# Altium PCB SRM_DOUBLE_V2_SIGNAL.PcbDoc (part 2 of 2)
Units mil, origin at the board's own origin, x right, y up, seen from the top; angles counter-clockwise.
Board outline 9351.05 x 5413.48 mil, 2 copper layers (Top Layer, Bottom Layer); 135 components, 145 nets, 510 pads, 115 vias.
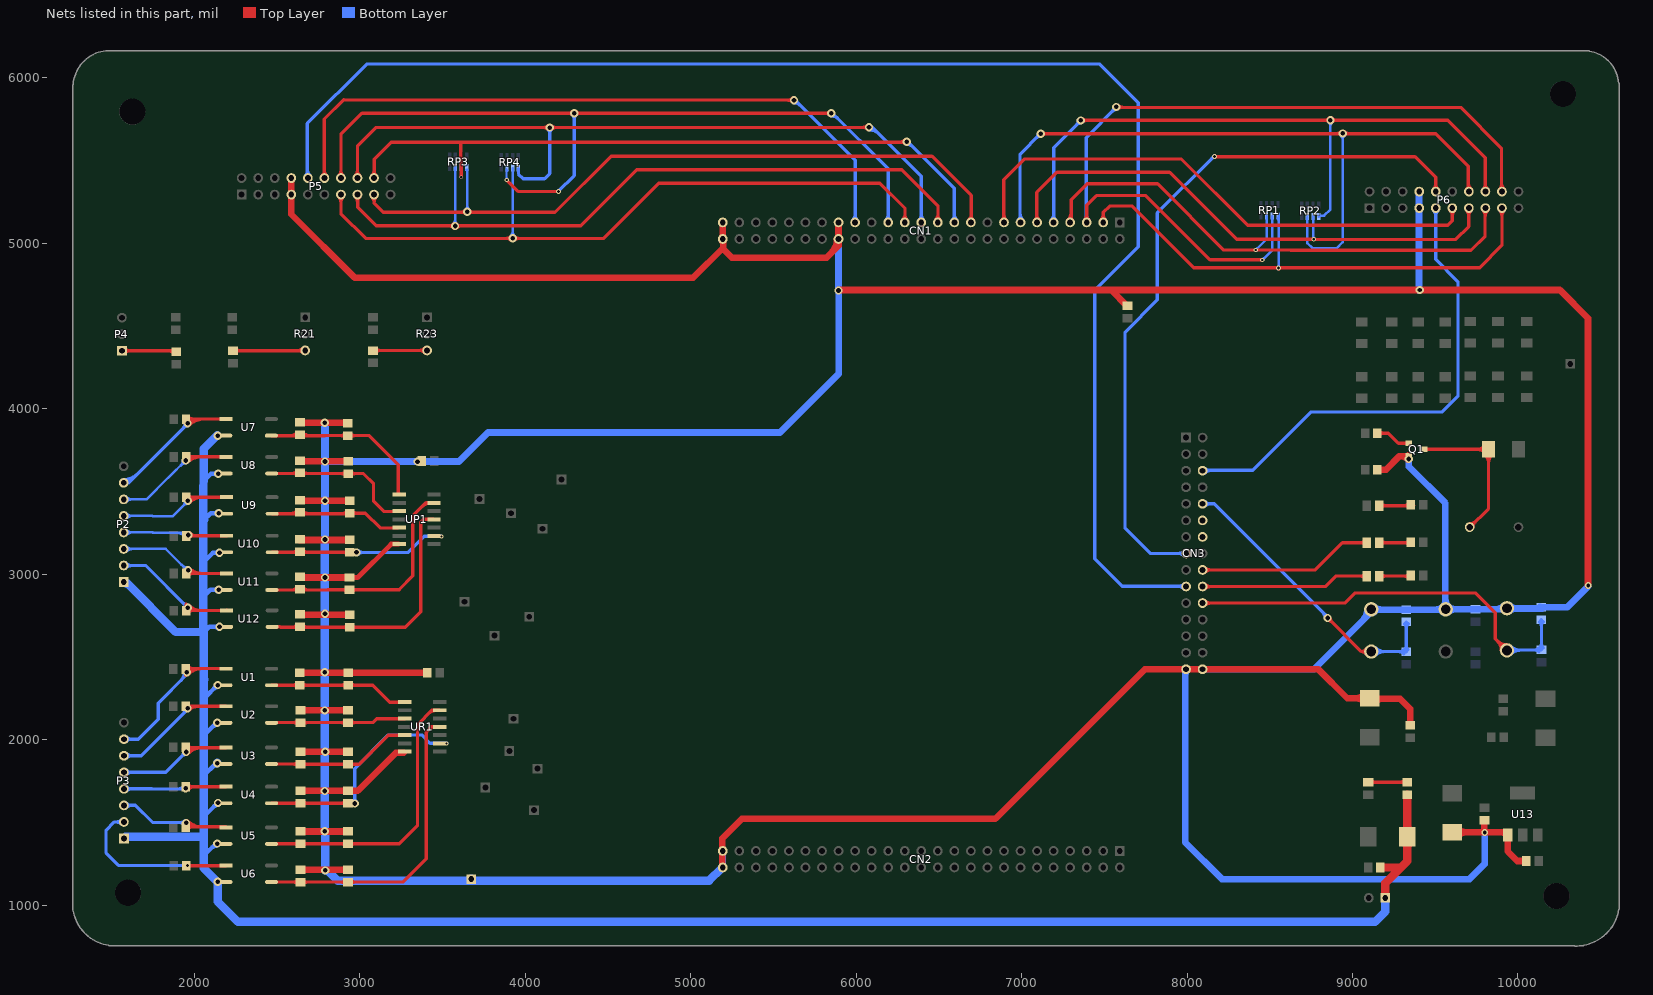
[diagram p2: the nets of this part, all layers, seen from the top]

## Via types
v1: diameter 50, hole 28, Top Layer to Bottom Layer, 67 vias
v2: diameter 30, hole 18, Top Layer to Bottom Layer, 19 vias
v3: diameter 40, hole 22, Top Layer to Bottom Layer, 12 vias
v4: diameter 24, hole 12, Top Layer to Bottom Layer, 9 vias
v5: diameter 26, hole 14, Top Layer to Bottom Layer, 5 vias
v6: diameter 50, hole 26, Top Layer to Bottom Layer, 1 vias
v7: diameter 35, hole 18, Top Layer to Bottom Layer, 1 vias
v8: diameter 22, hole 14, Top Layer to Bottom Layer, 1 vias

## Nets (pads, with @x,y where several pads share a name; then routed paths per layer and width w, separated by ;. In a path a pad name is that pad's centre, name@x,y a point inside that pad or via, vN(x,y) a via of type N, cw(c..) or ccw(c..) an arc to the next point about the centre after c; other vN are vias at no path point) (continued)
FWD: C3.2 CN3.10 key1.3 R11.1 | length 2344.3
  Top Layer w20: v1@8847,2740 9054,2533 ; v1@8849,2721 cw(c8849,2679.96) 8878.02,2708.98 ; v1@8864,2736 ccw(c8895.38,2736) 8873.19,2713.81 ; key1.3@9084.48,2515.79 ccw(c9054,2497.4) 9054,2533 ; key1.3@9084.48,2550.21 cw(c9054,2568.6) 9054,2533 ; key1.3@9113,2533 9054,2533
  Bottom Layer w20: CN3.10@8094,3426 8164,3426 v1@8847.5,2742.5 ; CN3.10@8107.81,3412.19 cw(c8141.14,3378.86) 8141.14,3426 cw(c8141.14,3473.14) CN3.10@8107.81,3439.81 ; 8819.86,2770.14 cw(c8785.72,2736) v1@8834,2736 ; 8831.93,2758.07 ccw(c8849,2775.14) v1@8849,2751 ; key1.3@9113,2533 9322.4,2533 9322.7,2532.7 R11.1@9324,2531.4 C3.2@9324,2711 ; key1.3@9136.55,2509.45 cw(c9193.41,2452.59) 9193.41,2533 cw(c9193.41,2613.41) key1.3@9136.55,2556.55 ; 9278.57,2533 cw(c9278.57,2489.9) R11.1@9309.04,2520.38 ; 9286.28,2533 ccw(c9286.28,2565.18) R11.1@9309.04,2542.43 ; R11.1@9312.98,2542.43 ccw(c9286.36,2569.04) 9324,2569.04 ccw(c9361.64,2569.04) R11.1@9335.02,2542.43 ; C3.2@9313.98,2700.57 cw(c9289.78,2676.37) 9324,2676.37 ; 9324,2671.55 cw(c9365.05,2671.55) C3.2@9336.02,2700.57
  other v1: 8849,2736
GND: C3.1 C4.1 C5.1 C6.1 C7.1 C8.1 C9.1 C10.1 C11.1 C12.1 C16.1 C17.1 C18.1 C19.1 C20.1 C21.1 C22.1 C23.2 C24.1 C25.1 C26.1 C27.2 CN1.35 CN1.36 CN1.49 CN1.50 CN2.49 CN2.50 CN3.29 CN3.30 key1.1 key2.1 key3.1 L4.2 P5.7 P5.8 P6.7 P6.8 Q1.2 R14.2 R15.2 R16.2 R17.2 R18.2 R19.2 R31.2 R32.2 R33.2 R34.2 R35.2 R36.2 R37.2 T8.1 U13.1 UP1.7 UR1.7 | length 39889.6
  Top Layer w30: 2898,2980.4 2986.57,2980.4 3188.17,3182 UP1.7@3233,3182
  Top Layer w40: P5.8@2585,5401 2585,5176 2968,4793 5015,4793 5196,4974 ; R36.2@2637,2754.4 C22.1@2938,2754.4 ; R35.2@2637,2980.4 C21.1@2936,2980.4 2898,2980.4 ; R34.2@2637,3207.4 C20.1@2939,3207.4 ; R33.2@2637,3444.4 C19.1@2938,3444.4 ; R32.2@2637,3683.4 C18.1@2929,3683.4 ; R31.2@2637.97,3916.32 v1(2787.27,3915.13) 2922.34,3914.05 2922.92,3915.41 C17.1@2924,3915.4 ; R16.2@2641.6,1927.4 C8.1@2928.53,1927.4 ; R17.2@2655,1691.4 2987.4,1691.4 3216,1920 UR1.7@3264,1920 ; 2761,2754.4 ccw(c2761,2789) v1@2785.46,2764.54 ; v1@2792.54,2764.54 ccw(c2817,2789) 2817,2754.4 ; C8.1@2927.95,1927.04 2928.22,1926.52 C8.1@2929,1925 ; C11.1@2928,1214.4 R19.2@2640,1214.4 ; C10.1@2928,1445.4 R18.2@2640,1445.4 ; C7.1@2928,2178.4 R15.2@2640,2178.4 ; C12.1@3407.6,2405 3407,2404.4 R14.2@2636,2404.4 ; CN1.50@5186.26,5020.26 cw(c5162.76,4996.76) 5196,4996.76 ; CN2.50@5191,1228 5191,1404 5309,1522 6841,1522 7745,2426 CN3.30@8098,2426 ; CN1.49@5192,5130 5193,5130 CN1.50@5193,5027 ; CN1.50@5196,5026 5196,4966 5249,4913 5820,4913 5893,4986 CN1.35@5893,5127 ; 5847.74,4940.74 ccw(c5761.49,5027) CN1.36@5883.47,5027 ; v1@5892,4718 10253,4718 10423,4548 v3@10423,2932 ; 7542,4718 7542,4717 7636.6,4622.4 L4.2@7639,4622.4 ; CN3.30@8090,2427 8792,2427 8968,2251 C27.2@9099,2251 ; C27.2@9072.79,2229.79 ccw(c9021.57,2178.57) 9021.57,2251 ccw(c9021.57,2323.43) C27.2@9072.79,2272.21 ; C27.2@9102,2248 9103.92,2247.95 9107.05,2247.86 9172,2247.91 9287,2248 9349,2186 C26.1@9349,2087.4 ; C27.2@9135.23,2229.8 cw(c9178.91,2186.19) 9178.86,2247.92 ; R37.2@9150.4,3632 9202,3632 9284,3714 9336.16,3714 Q1.2@9336.16,3717.6 ; 9285.89,3714 cw(c9285.89,3643.89) v1@9335.46,3693.46 ; key3.1@9562,2791 key3.1@9564,2793 ; C23.2@9609,1438 9671,1440 ; C23.2@9634.21,1418.79 cw(c9685.43,1367.57) 9685.43,1440 cw(c9685.43,1512.43) C23.2@9634.21,1461.21 ; C23.2@9637.48,1422.67 cw(c9671,1398.94) 9671,1440 ; C23.2@9637.48,1457.33 ccw(c9671,1481.06) 9671,1440 ; v3@9797,1440 C16.1@9797,1513.6 ; 9898.51,1440 cw(c9898.51,1393.39) U13.1@9931.47,1426.35 ; U13.1@9934,1427 U13.1@9938.19,1422.81 ; U13.1@9935.93,1425.07 U13.1@9936.02,1422.96 ; U13.1@9936,1440 9671,1440 ; U13.1@9939,1420 9938.19,1376 9938.19,1324.81 9996,1267 C24.1@10050.6,1267 ; R14.2@2636,2404.4 2674,2404.4 R14.2@2636,2404.4 ; R19.2@2640,1214.4 2678,1214.4 R19.2@2640,1214.4 ; R18.2@2640,1445.4 2678,1445.4 R18.2@2640,1445.4 ; R15.2@2640,2178.4 2678,2178.4 R15.2@2640,2178.4 ; C18.1@2929,3683.4 2891,3683.4 C18.1@2929,3683.4 ; C22.1@2938,2754.4 2900,2754.4 C22.1@2938,2754.4 ; C19.1@2938,3444.4 2900,3444.4 C19.1@2938,3444.4 ; C20.1@2939,3207.4 2901,3207.4 C20.1@2939,3207.4
  Bottom Layer w40: v1@2787,3915.4 v1@2789,3913.4 ; v1@2787.27,3911 v1(2787.27,3915.13) ; v1@2788,1450 v1@2790,1448 ; v1@2788,3209 v1(2789,3210) ; v1(2789,3682) 3599,3682 3774,3857 5539,3857 5895,4213 v1@5895,4713 ; CN2.50@5193,1228 CN2.49@5193,1328 ; v1@5893,4720 CN1.36@5893,5027 ; 7988,2388.51 cw(c8031.49,2388.51) CN3.29@8000.74,2419.26 ; CN3.29@7988,2428 7988,1380 8211,1157 9707,1157 9798,1248 v3@9798,1445 ; CN3.30@8091,2427 8768,2427 9108,2767 key1.1@9121,2767 ; 9061.9,2720.9 ccw(c8994.8,2788) key1.1@9089.69,2788 ; key1.1@9113,2788 9114.5,2789.5 9117.6,2786.4 9561.4,2786.4 key3.1@9563,2788 C5.1@9757.6,2788 ; key1.1@9129.48,2771.52 cw(c9165.41,2735.59) 9165.41,2786.4 ; key1.1@9129.48,2804.48 ccw(c9173.13,2848.13) 9173.13,2786.4 ; 9339,3655 v1@9339,3700 ; 9341,3650 9561,3430 9561,2790 key3.1@9557,2786 ; v6@9402,4713 P6.8@9402,5313 ; 9502.87,2786.4 ccw(c9502.87,2848.13) 9546.52,2804.48 ccw(c9511.56,2839.44) 9561,2839.44 ; 9510.59,2786.4 cw(c9510.59,2735.59) key3.1@9546.52,2771.52 ; 9561,2849.1 ccw(c9624.1,2849.1) 9579.48,2804.48 ccw(c9619.27,2844.27) 9619.27,2788 ccw(c9619.27,2731.73) key3.1@9579.48,2771.52 ; C5.1@9739,2788 9743.01,2787.94 C5.1@9743.53,2787.94 ; C5.1@9743,2787.4 C5.1@9743.6,2788 ; C5.1@9757.01,2787.4 9965.4,2787.4 9967.5,2789.5 key2.1@9969,2788 ; 9858.39,2787.4 ccw(c9858.39,2869.61) key2.1@9916.52,2811.48 ; key2.1@9928.6,2793.4 C4.1@10145,2793.4 ; key2.1@9949.48,2778.52 cw(c9985.41,2742.59) 9985.41,2793.4 ; key2.1@9949.48,2811.48 ccw(c9993.13,2855.13) 9993.13,2793.4 ; 10109.08,2793.4 ccw(c10109.08,2827.38) C4.1@10133.11,2803.36 ; C4.1@10142,2800 10296,2800 10423,2927 v3@10423,2932
  Bottom Layer w50: v1@2788,1209 2804,1209 2865,1148 5111,1148 CN2.50@5188,1225 ; v1@2788,1450 v1@2788,3209 ; v1(2789,3210) v1@2789,3913.4 ; v1(2790,1210) v1@2790,1448 ; 3640.34,1148 ccw(c3640.34,1189.66) T8.1@3669.8,1160.2 ; T8.1@3676.2,1160.2 ccw(c3705.66,1189.66) 3705.66,1148
  other v1: 2788,1447 2788,1690 2790,1927.4 2788,2177 2788,2408 2789,2761 2789,2980.4 2789,3444.4 3348,3681 9339,3697 5893,4715
  other v3: 9800,1439 10424,2932
  other v6: 9406,4718
GND_HALL: C1.1 C2.2 P1.1 P2.1 P3.1 R2.1 U1.3 U2.3 U3.3 U4.3 U5.3 U6.3 U7.3 U8.3 U9.3 U10.3 U11.3 U12.3 | length 14004.3
  Top Layer w50: C1.1@9168.4,1228 9291,1228 ; P1.1@9198,1044 9198,1134 9331,1267 R2.1@9331,1668.6 ; C2.2@9313.32,1385.32 cw(c9270.64,1342.64) 9331,1342.64 cw(c9391.36,1342.64) C2.2@9348.68,1385.32 ; C2.2@9313.32,1440.68 ccw(c9270.64,1483.36) 9331,1483.36 ccw(c9391.36,1483.36) C2.2@9348.68,1440.68
  Bottom Layer w26: 2047,1527 2138,1618 v1(2142,1618) ; 2051.34,2643.66 2089.68,2682 v1(2151,2682) ; 2052,1779 2131,1858 v1@2138,1858 ; 2053.18,2864.22 2094.96,2906 v1(2146,2906) ; 2056,3075 2111,3130 v1(2151,3130) ; 2056,3564 2100,3608 v1(2143,3608) ; 2057,2134 2062,2134 ; 2058,1301 2129,1372 v1(2138,1372) ; 2058,2027 2133,2102 v1(2138,2102) ; 2058,3329 2098,3369 v1(2146,3369) ; 2062,2254 2138,2330 v1(2140,2330) ; 2102.15,1345.15 cw(c2138,1309.3) v1@2138,1360 ; 2103.86,1830.86 cw(c2138,1796.72) v1@2138,1845 ; 2108.98,2077.98 cw(c2138,2048.96) v1@2138,2090 ; 2114.69,1594.69 cw(c2142,1567.37) v1@2142,1606 ; 2116.1,2308.1 cw(c2140,2284.2) v1@2140,2318 ; 2120.93,2312.93 ccw(c2103.86,2330) v1@2128,2330 ; v1@2134.51,3599.51 ccw(c2114.03,3579.03) 2114.03,3608 ccw(c2114.03,3636.97) v1@2134.51,3616.49 ; v1@2137.51,2897.51 ccw(c2117.03,2877.03) 2117.03,2906 ccw(c2117.03,2934.97) v1@2137.51,2914.49 ; v1@2137.51,3360.51 ccw(c2117.03,3340.03) 2117.03,3369 ccw(c2117.03,3397.97) v1@2137.51,3377.49 ; v1@2142.51,2673.51 ccw(c2122.03,2653.03) 2122.03,2682 ccw(c2122.03,2710.97) v1@2142.51,2690.49 ; v1@2142.51,3121.51 ccw(c2122.03,3101.03) 2122.03,3130 ccw(c2122.03,3158.97) v1@2142.51,3138.49
  Bottom Layer w50: P3.1@1571,1401 1583,1413 2055,1413 ; P2.1@1572,2948.47 cw(c1572,2906.16) 1601.92,2936.08 ; P2.1@1572,2953 1575,2950 1588,2950 1886.36,2651.64 2056,2652 ; P3.1@1576.2,1399.8 cw(c1608.07,1367.93) 1608.07,1413 ; 2051.34,2643.66 2055,2643.66 2055,2364 2059,2364 ; 2053,2652 2053.18,2864.22 2053.37,3099.63 2053.57,3329 2053.92,3757.06 ; 2055,1658 2057,1658 ; 2055,2362 2055,1225 v1@2136,1144 ; 2055,3329 2058,3329 ; 2056,3564 2056,3759.14 2059,3762.13 v1@2138,3841 ; v1(2138,1857) v1@2138,1860 ; v1@2140,1139 2140,1022 2263,899 9135,899 9198,962 P1.1@9198,1040
  other v1: 2141,1141 2141,3838
L1: P2.7 R25.2 U7.1 | length 1213
  Top Layer w20: R25.2@1940.32,3930.68 cw(c1960.41,3910.59) R25.2@1960.41,3939 ; R25.2@1954.46,3916.54 cw(c2008.7,3862.3) 2008.7,3939 ; R25.2@1958,3939 U7.1@2193,3939 ; R25.2@1959.43,3929.91 cw(c1981.36,3907.97) 1981.36,3939 ; R25.2@1959.43,3951.96 ccw(c1990.72,3983.25) 1990.72,3939 ; v1@1968.61,3902.39 cw(c2056.98,3814.02) 2056.98,3939
  Bottom Layer w20: P2.7@1572,3552.53 ccw(c1572,3623.81) 1622.41,3573.41 ; P2.7@1572,3553 1602,3553 v1@1956.5,3907.5 ; P2.7@1572,3572.53 ccw(c1572,3692.1) 1656.55,3607.55 ; 1929.56,3880.56 ccw(c1897.13,3913) v1@1943,3913 ; 1939.22,3890.22 cw(c1958,3871.44) v1@1958,3898
  other v1: 1958,3913
L2: P2.4 R28.2 U10.1 | length 948.7
  Top Layer w20: R28.2@1948,3233 U10.1@2194,3233 ; R28.2@1960.43,3220.98 cw(c1989.45,3191.95) 1989.45,3233 ; R28.2@1960.43,3243.02 ccw(c1984.63,3267.22) v1@1984.63,3233 ; R28.2@1973.61,3226.39 cw(c1989.56,3210.44) 1989.56,3233 ; R28.2@1973.61,3247.61 ccw(c2008.87,3282.87) 2008.87,3233
  Bottom Layer w15: P2.4@1575,3253 1749,3253 1747,3252 v1@1961,3251 ; P2.4@1587.58,3237.42 cw(c1625.18,3199.82) 1625.18,3253 cw(c1625.18,3306.18) P2.4@1587.58,3268.58 ; 1887.04,3251.35 cw(c1886.62,3161.33) v1@1950.57,3224.68 ; 1923.25,3251.18 cw(c1923,3197.37) v1@1961.22,3235.24
  other v1: 1963,3237
M1: P2.6 R26.2 U8.1 | length 1070.6
  Top Layer w20: R26.2@1943.46,3691.54 cw(c1988.04,3646.96) 1988.04,3710 ; R26.2@1945.17,3708.52 1945,3710 2190,3710 U8.1@2191,3709 ; v1@1957.61,3677.39 cw(c2036.33,3598.67) 2036.33,3710 ; R26.2@1960.43,3697.98 cw(c1989.45,3668.95) 1989.45,3710 ; R26.2@1960.43,3720.02 ccw(c1984.63,3744.22) 1984.63,3710 ; U8.1@2187,3710 2190.06,3709.94 U8.1@2191.02,3709.92
  Bottom Layer w15: P2.6@1572,3453 1710,3453 1841,3584 1842,3584 v1@1947,3689 ; P2.6@1587.58,3437.42 cw(c1625.18,3399.82) 1625.18,3453 cw(c1625.18,3506.18) P2.6@1587.58,3468.58 ; 1915.42,3657.42 cw(c1947,3625.84) v1@1947,3670.5 ; 1917.83,3659.83 ccw(c1889.67,3688) v1@1929.5,3688
  other v1: 1947,3688
M2: P2.3 R29.2 U11.1 | length 1004.8
  Top Layer w20: R29.2@1948,3005 U11.1@2192,3005 ; R29.2@1957.46,3020.46 ccw(c1994.8,3057.8) 1994.8,3005 ; R29.2@1960.43,2992.98 cw(c1989.45,2963.95) 1989.45,3005 ; R29.2@1960.43,3015.02 ccw(c1984.63,3039.22) 1984.63,3005 ; v1@1971.61,3034.61 ccw(c2043.08,3106.08) 2043.08,3005
  Bottom Layer w15: P2.3@1572,3153 1826,3153 1944,3035 v1@1944,3025 ; P2.3@1587.58,3137.42 cw(c1625.18,3099.82) 1625.18,3153 cw(c1625.18,3206.18) P2.3@1587.58,3168.58 ; 1920.88,3058.12 ccw(c1961,3098.23) v1@1961,3041.5 ; 1935.37,3043.63 cw(c1915.74,3024) v1@1943.5,3024
  other v1: 1961,3024
MCLKRA: CN3.18 D3.2 | length 1194.4
  Top Layer w20: CN3.18@8094,3026 8774,3026 8939,3191 D3.2@9086.86,3191 ; CN3.18@8107.81,3012.19 cw(c8141.14,2978.86) 8141.14,3026 cw(c8141.14,3073.14) CN3.18@8107.81,3039.81 ; D3.2@9075.83,3179.98 ccw(c9049.22,3153.36) 9049.22,3191 ccw(c9049.22,3228.64) D3.2@9075.83,3202.02
MFSRA: C4.2 CN3.22 key2.3 R12.1 | length 2990
  Top Layer w20: CN3.22@8094,2826 8954,2826 9015,2887 9743,2887 9862,2768 9862,2611 key2.3@9931,2542 ; CN3.22@8107.81,2812.19 cw(c8141.14,2778.86) 8141.14,2826 cw(c8141.14,2873.14) CN3.22@8107.81,2839.81 ; key2.3@9899.69,2540 ccw(c9819.28,2540) 9876.14,2596.86 ccw(c9933,2653.72) key2.3@9933,2573.31
  Bottom Layer w20: key2.3@9934,2542 R12.1@10140.4,2542 ; key2.3@9956.55,2516.45 cw(c10018.24,2454.76) 10018.24,2542 ; key2.3@9956.55,2563.55 ccw(c10008.58,2615.58) 10008.58,2542 ; 10097.04,2542 ccw(c10097.04,2584.42) R12.1@10127.04,2554.43 ; 10103.81,2542 cw(c10103.81,2509.15) R12.1@10127.04,2532.38 ; C4.2@10129.98,2713.57 cw(c10100.95,2684.55) 10142,2684.55 ; R12.1@10130.98,2554.43 ccw(c10104.36,2581.04) 10142,2581.04 ccw(c10179.64,2581.04) R12.1@10153.02,2554.43 ; C4.2@10141,2724.6 10142,2723.6 R12.1@10142,2543.4 ; R12.1@10141.4,2544 R12.1@10142,2544.6 ; 10142,2689.37 cw(c10176.22,2689.37) C4.2@10152.02,2713.57
MFSZA: CN3.20 D4.2 | length 1152.1
  Top Layer w20: CN3.20@8094,2926 8836,2926 8899,2989 D4.2@9086.86,2989 ; CN3.20@8107.81,2912.19 cw(c8141.14,2878.86) 8141.14,2926 cw(c8141.14,2973.14) CN3.20@8107.81,2939.81 ; D4.2@9075.83,2977.98 ccw(c9049.22,2951.36) 9049.22,2989 ccw(c9049.22,3026.64) D4.2@9075.83,3000.02
N1: P2.5 R27.2 U9.1 | length 1020.3
  Top Layer w20: R27.2@1948,3466 U9.1@2192,3466 ; R27.2@1956.46,3447.54 cw(c2001.04,3402.96) 2001.04,3466 ; R27.2@1960.43,3453.98 cw(c1989.45,3424.95) 1989.45,3466 ; R27.2@1960.43,3476.02 ccw(c1984.63,3500.22) 1984.63,3466 ; v1@1970.61,3433.39 cw(c2049.33,3354.67) 2049.33,3466
  Bottom Layer w15: P2.5@1572,3353 1746,3353 1747,3352 1869,3352 v1@1963,3446 ; P2.5@1587.58,3337.42 cw(c1625.18,3299.82) 1625.18,3353 cw(c1625.18,3406.18) P2.5@1587.58,3368.58 ; 1929.42,3412.42 ccw(c1897.84,3444) v1@1942.5,3444 ; 1931.83,3414.83 cw(c1960,3386.67) v1@1960,3426.5
  other v1: 1960,3444
N2: P2.2 R30.2 U12.1 | length 1123.4
  Top Layer w20: R30.2@1939.34,2795.85 ccw(c1921.03,2817.52) v1@1949.4,2818.01 ; R30.2@1950,2781 2193,2781 U12.1@2194,2782 ; R30.2@1950,2783 v1@1949.4,2818 ; R30.2@1956.46,2794.46 ccw(c1988.97,2826.97) 1988.97,2781 ; R30.2@1959.73,2795.62 cw(c1979.97,2818.53) v1@1949.4,2818.01 ; R30.2@1960.43,2768.98 cw(c1989.45,2739.95) 1989.45,2781 ; R30.2@1960.43,2791.02 ccw(c1984.63,2815.22) 1984.63,2781 ; R30.2@1970.61,2808.61 ccw(c2037.25,2875.25) 2037.25,2781
  Bottom Layer w20: P2.2@1572,3053 1706,3053 v1@1960,2799 ; P2.2@1585.81,3039.19 cw(c1619.14,3005.86) 1619.14,3053 cw(c1619.14,3100.14) P2.2@1585.81,3066.81 ; 1933.69,2825.31 cw(c1906.37,2798) v1@1945,2798 ; 1936.1,2822.9 ccw(c1960,2846.8) v1@1960,2813
  other v1: 1960,2798
NetBuzzer1_2: Buzzer1.2 D19.1 Q1.3 | length 1257.9
  Top Layer w20: Q1.3@9433,3755 D19.1@9822,3755 ; Buzzer1.2@9708,3285 9708,3284 9709,3284 9822,3397 9822,3697 ; Buzzer1.2@9708,3304.53 ccw(c9708,3356.5) 9744.75,3319.75 ; Buzzer1.2@9727.53,3285 cw(c9769.84,3285) 9739.92,3314.92 ; D19.1@9801.23,3723.6 cw(c9751.09,3673.46) 9822,3673.46 cw(c9892.91,3673.46) D19.1@9842.77,3723.6 ; D19.1@9801.23,3734.23 ccw(c9751.09,3684.09) 9751.09,3755 ccw(c9751.09,3825.91) D19.1@9801.23,3775.77 ; D19.1@9808.94,3718.06 cw(c9798.49,3697) 9822,3697 ; D19.1@9820,3755 9820,3754.93 9822,3697 ; D19.1@9835.06,3718.06 ccw(c9845.51,3697) 9822,3697
NetC6_2: C6.2 R14.1 U1.4 UR1.1 | length 1360.5
  Top Layer w20: U1.4@2465.59,2329 2466.19,2329.6 2598,2329.6 ; R14.1@2621.04,2318.57 ccw(c2594.42,2291.96) 2594.42,2329.6 ccw(c2594.42,2367.24) R14.1@2621.04,2340.62 ; R14.1@2650.96,2318.57 cw(c2677.57,2291.96) 2677.57,2329.6 ; R14.1@2650.96,2340.62 ccw(c2677.58,2367.24) 2677.58,2329.6 ; C6.2@2914.04,2318.57 ccw(c2887.42,2291.96) 2887.42,2329.6 ccw(c2887.42,2367.24) C6.2@2914.04,2340.62 ; C6.2@2943.96,2318.57 cw(c2970.58,2291.96) 2970.58,2329.6 cw(c2970.58,2367.24) C6.2@2943.96,2340.62 ; UR1.1@3268,2229 3266,2227 3181,2227 3078.4,2329.6 R14.1@2636,2329.6 ; 2598,2329.6 cw(c2598,2300.19) 2620.26,2319.41 ccw(c2598,2300.19) 2598,2329.6 ; 2598,2329.6 ccw(c2598,2359.01) 2620.26,2339.79 cw(c2598,2359.01) 2598,2329.6 ; 2598,2329.6 R14.1@2636,2329.6 ; R14.1@2636,2329.6 2674,2329.6 ; R14.1@2636,2329.6 2674,2329.6 ; 2674,2329.6 cw(c2674,2359.01) 2651.74,2339.79 ccw(c2674,2359.01) 2674,2329.6 ; 2674,2329.6 ccw(c2674,2300.19) 2651.74,2319.41 cw(c2674,2300.19) 2674,2329.6
NetC7_2: C7.2 R15.1 U2.4 UR1.3 | length 1331.3
  Top Layer w20: U2.4@2465.59,2102 2467.19,2103.6 2602,2103.6 ; R15.1@2625.04,2092.57 ccw(c2598.42,2065.96) 2598.42,2103.6 ccw(c2598.42,2141.24) R15.1@2625.04,2114.62 ; R15.1@2654.96,2092.57 cw(c2681.57,2065.96) 2681.57,2103.6 ; R15.1@2654.96,2114.62 ccw(c2681.58,2141.24) 2681.58,2103.6 ; C7.2@2913.04,2092.57 ccw(c2886.42,2065.96) 2886.42,2103.6 ccw(c2886.42,2141.24) C7.2@2913.04,2114.62 ; C7.2@2942.96,2092.57 cw(c2969.58,2065.96) 2969.58,2103.6 cw(c2969.58,2141.24) C7.2@2942.96,2114.62 ; UR1.3@3272,2127 3102,2127 3078.6,2103.6 R15.1@2640,2103.6 ; 2602,2103.6 cw(c2602,2074.19) 2624.26,2093.41 ccw(c2602,2074.19) 2602,2103.6 ; 2602,2103.6 ccw(c2602,2133.01) 2624.26,2113.79 cw(c2602,2133.01) 2602,2103.6 ; 2602,2103.6 R15.1@2640,2103.6 ; R15.1@2640,2103.6 2678,2103.6 ; R15.1@2640,2103.6 2678,2103.6 ; 2678,2103.6 cw(c2678,2133.01) 2655.74,2113.79 ccw(c2678,2133.01) 2678,2103.6 ; 2678,2103.6 ccw(c2678,2074.19) 2655.74,2093.41 cw(c2678,2074.19) 2678,2103.6
NetC8_2: C8.2 R16.1 U3.4 UR1.5 | length 1225.9
  Top Layer w20: U3.4@2465.59,1853 2601.6,1853 ; 2597.45,1853 cw(c2597.45,1813.99) R16.1@2625.04,1841.57 ; 2599.39,1853 ccw(c2599.39,1889.27) R16.1@2625.04,1863.62 ; R16.1@2624.16,1842.53 ccw(c2601.6,1823.46) 2601.6,1853 ; R16.1@2624.26,1842.41 ccw(c2602,1823.19) 2602,1852.6 ; R16.1@2624.26,1862.79 cw(c2602,1882.01) 2602,1852.6 ; R16.1@2624.56,1863.12 cw(c2601.6,1884.1) 2601.6,1853 ; R16.1@2654.96,1841.57 cw(c2679.16,1817.38) 2679.16,1851.6 ; R16.1@2654.96,1863.62 ccw(c2683.99,1892.65) 2683.99,1851.6 ; C8.2@2913.04,1840.57 ccw(c2886.42,1813.96) 2886.42,1851.6 ccw(c2886.42,1889.24) C8.2@2913.04,1862.62 ; C8.2@2942.96,1840.57 cw(c2969.58,1813.96) 2969.58,1851.6 cw(c2969.58,1889.24) C8.2@2942.96,1862.62 ; UR1.5@3261,2026 UR1.5@3262,2027 ; UR1.5@3278,2027.83 3170.83,2027.83 2994.6,1851.6 2641,1851.6 R16.1@2640,1852.6 2602,1852.6 ; 2601.6,1853 2602,1852.6
NetC9_2: C9.2 R17.1 U4.4 UR1.9 | length 1847.1
  Top Layer w20: U4.4@2465.59,1616 2466.19,1616.6 2602,1616.6 ; R17.1@2625.04,1605.57 ccw(c2598.42,1578.96) 2598.42,1616.6 ccw(c2598.42,1654.24) R17.1@2625.04,1627.62 ; R17.1@2654.96,1605.57 cw(c2681.57,1578.96) 2681.57,1616.6 ; R17.1@2654.96,1627.62 ccw(c2681.58,1654.24) 2681.58,1616.6 ; C9.2@2913.04,1605.57 ccw(c2886.42,1578.96) 2886.42,1616.6 ccw(c2886.42,1654.24) C9.2@2913.04,1627.62 ; C9.2@2928,1616.6 R17.1@2640,1616.6 ; 2602,1616.6 cw(c2602,1587.19) 2624.26,1606.41 ccw(c2602,1587.19) 2602,1616.6 ; 2602,1616.6 ccw(c2602,1646.01) 2624.26,1626.79 cw(c2602,1646.01) 2602,1616.6 ; 2602,1616.6 R17.1@2640,1616.6 ; R17.1@2640,1616.6 2678,1616.6 ; R17.1@2640,1616.6 2678,1616.6 ; 2678,1616.6 cw(c2678,1646.01) 2655.74,1626.79 ccw(c2678,1646.01) 2678,1616.6 ; 2678,1616.6 ccw(c2678,1587.19) 2655.74,1606.41 cw(c2678,1587.19) 2678,1616.6
  Bottom Layer w20: v1@2957.39,1624.61 ccw(c2931.79,1650.21) 2968,1650.21 ccw(c3004.21,1650.21) v1@2978.61,1624.61 ; v1(2968,1614) 2968,1825 3172,2029 3373,2029 3423,1979 v4@3524,1979
  other v4: 3524,1977
NetC10_2: C10.2 R18.1 U5.4 UR1.13 | length 2294.6
  Top Layer w20: U5.4@2465.59,1370 2466.19,1370.6 2602,1370.6 ; R18.1@2625.04,1359.57 ccw(c2598.42,1332.96) 2598.42,1370.6 ccw(c2598.42,1408.24) R18.1@2625.04,1381.62 ; R18.1@2654.96,1359.57 cw(c2681.57,1332.96) 2681.57,1370.6 ; R18.1@2654.96,1381.62 ccw(c2681.58,1408.24) 2681.58,1370.6 ; C10.2@2913.04,1359.57 ccw(c2886.42,1332.96) 2886.42,1370.6 ccw(c2886.42,1408.24) C10.2@2913.04,1381.62 ; C10.2@2942.96,1359.57 cw(c2969.58,1332.96) 2969.58,1370.6 cw(c2969.58,1408.24) C10.2@2942.96,1381.62 ; 3416.88,2160.71 cw(c3453.84,2123.74) UR1.13@3453.84,2176.02 ; 3424.08,2167.91 cw(c3445.97,2146.02) UR1.13@3453.41,2176.07 ; UR1.13@3481,2177.83 3434,2177.83 3348,2091.83 3348,1482 3236.6,1370.6 R18.1@2640,1370.6 ; 2602,1370.6 cw(c2602,1341.19) 2624.26,1360.41 ccw(c2602,1341.19) 2602,1370.6 ; 2602,1370.6 ccw(c2602,1400.01) 2624.26,1380.79 cw(c2602,1400.01) 2602,1370.6 ; 2602,1370.6 R18.1@2640,1370.6 ; R18.1@2640,1370.6 2678,1370.6 ; R18.1@2640,1370.6 2678,1370.6 ; 2678,1370.6 cw(c2678,1400.01) 2655.74,1380.79 ccw(c2678,1400.01) 2678,1370.6 ; 2678,1370.6 ccw(c2678,1341.19) 2655.74,1360.41 cw(c2678,1341.19) 2678,1370.6
NetC11_2: C11.2 R19.1 U6.4 UR1.11 | length 2281.8
  Top Layer w20: U6.4@2465.4,1139.6 R19.1@2640,1139.6 ; R19.1@2625.04,1128.57 ccw(c2598.42,1101.96) 2598.42,1139.6 ccw(c2598.42,1177.24) R19.1@2625.04,1150.62 ; R19.1@2638,1145 2643.4,1139.6 2890,1139.6 ; R19.1@2654.96,1128.57 cw(c2681.58,1101.96) 2681.58,1139.6 cw(c2681.58,1177.24) R19.1@2654.96,1150.62 ; 2886.42,1139.6 cw(c2886.42,1101.96) C11.2@2913.04,1128.57 ; 2886.43,1139.6 ccw(c2886.43,1177.24) C11.2@2913.04,1150.62 ; C11.2@2942.96,1128.57 cw(c2969.58,1101.96) 2969.58,1139.6 cw(c2969.58,1177.24) C11.2@2942.96,1150.62 ; 3413.17,2059.17 cw(c3453.84,2018.5) UR1.11@3453.84,2076.02 ; 3422.99,2068.99 cw(c3443.88,2048.11) UR1.11@3453.27,2076.11 ; UR1.11@3490,2080 3434,2080 3400,2046 3400,1281.2 3258.4,1139.6 2890,1139.6 ; 2890,1139.6 cw(c2890,1110.19) 2912.26,1129.41 ccw(c2890,1110.19) 2890,1139.6 ; 2890,1139.6 ccw(c2890,1169.01) 2912.26,1149.79 cw(c2890,1169.01) 2890,1139.6
NetC17_2: C17.2 R31.1 U7.4 UP1.1 | length 1244.9
  Top Layer w20: U7.4@2467,3837 2512,3838 2788.4,3838 ; 2579.49,3838 ccw(c2579.49,3898.17) R31.1@2622.04,3855.62 ; R31.1@2651.96,3855.62 ccw(c2694.51,3898.17) 2694.51,3838 ; 2675.61,3842 2676.21,3842.6 ; 2789,3838.6 3056.4,3838.6 3232,3663 UP1.1@3232,3485 ; C17.2@2911.04,3827.57 ccw(c2884.42,3800.96) 2884.42,3838.6 ccw(c2884.42,3876.24) C17.2@2911.04,3849.62 ; C17.2@2940.96,3827.57 cw(c2967.58,3800.96) 2967.58,3838.6 cw(c2967.58,3876.24) C17.2@2940.96,3849.62 ; 3232,3497.68 ccw(c3252.61,3497.68) UP1.1@3238.04,3483.11
NetC18_2: C18.2 R32.1 U8.4 UP1.3 | length 1344.3
  Top Layer w20: U8.4@2466.59,3609 2514,3609 2636.99,3608.8 2761,3608.6 C18.2@2929,3608.6 2891,3608.6 ; 2586.26,3608.88 ccw(c2586.35,3659.47) R32.1@2622.06,3623.64 ; 2604.57,3608.85 cw(c2604.53,3584.16) R32.1@2622.02,3601.59 ; R32.1@2651.94,3601.56 cw(c2669.34,3584.1) 2669.38,3608.75 ; R32.1@2651.98,3623.6 ccw(c2687.84,3659.35) 2687.76,3608.72 ; 2887.42,3608.6 cw(c2887.42,3570.96) C18.2@2914.04,3597.57 ; 2887.43,3608.6 ccw(c2887.43,3646.24) C18.2@2914.04,3619.62 ; C18.2@2943.96,3597.57 cw(c2970.58,3570.96) 2970.58,3608.6 cw(c2970.58,3646.24) C18.2@2943.96,3619.62 ; UP1.3@3240,3380 3143,3380 3082,3441 3082,3548 3021.4,3608.6 2891,3608.6 ; 2891,3608.6 cw(c2891,3579.19) 2913.26,3598.41 ccw(c2891,3579.19) 2891,3608.6 ; 2891,3608.6 ccw(c2891,3638.01) 2913.26,3618.79 cw(c2891,3638.01) 2891,3608.6
NetC19_2: C19.2 R33.1 U9.4 UP1.5 | length 1075
  Top Layer w20: U9.4@2469.59,3366 2934.4,3366 C19.2@2934.4,3369.6 ; 2577.08,3366 ccw(c2577.08,3429.58) R33.1@2622.04,3384.62 ; R33.1@2651.96,3384.62 ccw(c2696.92,3429.58) 2696.92,3366 ; 2887.74,3366 ccw(c2887.74,3415.92) C19.2@2923.04,3380.62 ; 2905.11,3366 cw(c2905.11,3340.65) C19.2@2923.04,3358.57 ; C19.2@2932,3366 2934.4,3366.2 2934.55,3366.21 C19.2@2938.25,3366.51 ; C19.2@2934.4,3368 2938.06,3368.14 2976,3369.6 ; C19.2@2952.96,3358.57 cw(c2979.58,3331.96) 2979.58,3369.6 cw(c2979.58,3407.24) C19.2@2952.96,3380.62 ; C19.2@2953.74,3359.41 cw(c2976,3340.19) 2976,3369.6 ; C19.2@2953.74,3379.79 ccw(c2976,3399.01) 2976,3369.6 ; UP1.5@3229,3280 3122,3280 3032.4,3369.6 2976,3369.6
NetC20_2: C20.2 R34.1 U10.4 UP1.9 | length 1433.8
  Top Layer w20: U10.4@2469.59,3133 2517,3133 2768,3132.6 C20.2@2939,3132.6 ; 2586.28,3132.89 ccw(c2586.36,3183.45) R34.1@2622.06,3147.64 ; 2604.55,3132.86 cw(c2604.51,3108.14) R34.1@2622.02,3125.59 ; R34.1@2651.94,3125.56 cw(c2669.36,3108.08) 2669.4,3132.76 ; R34.1@2651.98,3147.61 ccw(c2687.82,3183.33) 2687.74,3132.73 ; 2897.42,3132.6 cw(c2897.42,3094.96) C20.2@2924.04,3121.57 ; 2897.43,3132.6 ccw(c2897.43,3170.24) C20.2@2924.04,3143.62 ; 2901,3132.6 cw(c2901,3103.19) 2923.26,3122.41 ccw(c2901,3103.19) 2901,3132.6 ; 2901,3132.6 ccw(c2901,3162.01) 2923.26,3142.79 cw(c2901,3162.01) 2901,3132.6 ; 2901,3132.6 C20.2@2939,3132.6 ; 2901,3132.6 C20.2@2939,3132.6
  Bottom Layer w20: v1(2979,3132) 3291,3132 3388,3229 v4(3492,3229) ; v1@2989.61,3121.39 cw(c3015.21,3095.79) 3015.21,3132 cw(c3015.21,3168.21) v1@2989.61,3142.61
NetC21_2: C21.2 R35.1 U11.4 UP1.13 | length 1910.2
  Top Layer w20: U11.4@2467.59,2905 2935.4,2905 2935.4,2905.6 2806,2905.6 ; 2584.32,2905 ccw(c2584.32,2958.34) R35.1@2622.04,2920.62 ; 2606.53,2905 cw(c2606.53,2883.06) R35.1@2622.04,2898.57 ; R35.1@2651.96,2898.57 cw(c2667.47,2883.06) 2667.47,2905 ; R35.1@2651.96,2920.62 ccw(c2689.68,2958.34) 2689.68,2905 ; 2892.98,2905 ccw(c2892.98,2944.68) 2921.04,2916.62 cw(c2894.42,2943.24) 2894.42,2905.6 cw(c2894.42,2867.96) 2921.04,2894.57 ccw(c2895.87,2869.4) 2895.87,2905 ; C21.2@2936,2905.6 3239,2905.6 3239,2910 3320,2991 3320,3352.83 3399,3431.83 UP1.13@3447.39,3431.83 ; C21.2@2950.96,2894.57 cw(c2977.58,2867.96) 2977.58,2905.6 cw(c2977.58,2943.24) C21.2@2950.96,2916.62 ; 3381.88,3414.71 cw(c3418.84,3377.74) UP1.13@3418.84,3430.02 ; 3389.08,3421.91 cw(c3410.97,3400.02) UP1.13@3418.41,3430.07
NetC22_2: C22.2 R36.1 U12.4 UP1.11 | length 2077.1
  Top Layer w20: U12.4@2469.59,2682 2517,2682 2519.4,2679.6 C22.2@2938,2679.6 ; 2585.77,2679.6 ccw(c2585.77,2730.89) R36.1@2622.04,2694.62 ; 2605.08,2679.6 cw(c2605.08,2655.62) R36.1@2622.04,2672.57 ; R36.1@2651.96,2672.57 cw(c2668.92,2655.62) 2668.92,2679.6 ; R36.1@2651.96,2694.62 ccw(c2688.23,2730.89) 2688.23,2679.6 ; 2896.42,2679.6 cw(c2896.42,2641.96) C22.2@2923.04,2668.57 ; 2896.43,2679.6 ccw(c2896.43,2717.24) C22.2@2923.04,2690.62 ; C22.2@2952.96,2668.57 cw(c2979.58,2641.96) 2979.58,2679.6 cw(c2979.58,2717.24) C22.2@2952.96,2690.62 ; UP1.11@3443,3332 3384,3332 3367,3315 3367,2772.2 3274.4,2679.6 2976,2679.6 ; 2900,2679.6 cw(c2900,2650.19) 2922.26,2669.41 ccw(c2900,2650.19) 2900,2679.6 ; 2900,2679.6 ccw(c2900,2709.01) 2922.26,2689.79 cw(c2900,2709.01) 2900,2679.6 ; 2900,2679.6 C22.2@2938,2679.6 ; 2900,2679.6 C22.2@2938,2679.6 ; C22.2@2938,2679.6 2976,2679.6 ; 2976,2679.6 cw(c2976,2709.01) 2953.74,2689.79 ccw(c2976,2709.01) 2976,2679.6 ; 2976,2679.6 ccw(c2976,2650.19) 2953.74,2669.41 cw(c2976,2650.19) 2976,2679.6
NetD1_1: D1.1 R1.1 | length 375
  Top Layer w20: D1.1@9162,3413 9195,3415 ; D1.1@9172.69,3403.98 cw(c9199.3,3377.36) 9199.3,3415 cw(c9199.3,3452.64) D1.1@9172.69,3426.02 ; D1.1@9173.63,3405.01 cw(c9195,3387.15) 9195,3415 ; D1.1@9173.63,3425 ccw(c9195,3442.85) 9195,3415 ; 9311.39,3415 ccw(c9311.39,3456.27) R1.1@9340.57,3427.09 ; 9316.53,3415 cw(c9316.53,3380.99) R1.1@9340.57,3405.04 ; R1.1@9369.6,3416 9347,3416 9346,3415 9195,3415
NetD2_2: D2.2 R2.2 | length 354.2
  Top Layer w20: D2.2@9095,1743.4 R2.2@9331,1743.4 ; D2.2@9111.93,1732.38 cw(c9138.54,1705.76) 9138.54,1743.4 cw(c9138.54,1781.04) D2.2@9111.93,1754.43 ; 9289.42,1743.4 cw(c9289.42,1705.76) R2.2@9316.04,1732.38 ; 9289.43,1743.4 ccw(c9289.43,1781.04) R2.2@9316.04,1754.43
NetD3_1: D3.1 R3.1 | length 309
  Top Layer w20: D3.1@9161.66,3191 R3.1@9351,3191 ; D3.1@9172.69,3179.98 cw(c9199.3,3153.36) 9199.3,3191 cw(c9199.3,3228.64) D3.1@9172.69,3202.02 ; 9311.7,3191 cw(c9311.7,3150.16) R3.1@9340.57,3179.04 ; 9316.22,3191 ccw(c9316.22,3225.44) R3.1@9340.57,3201.09 ; R3.1@9350.6,3195 R3.1@9351.6,3194
NetD4_1: D4.1 R4.1 | length 402.7
  Top Layer w20: D4.1@9163,2989 9195,2989 ; D4.1@9172.69,2977.98 cw(c9199.3,2951.36) 9199.3,2989 cw(c9199.3,3026.64) D4.1@9172.69,3000.02 ; 9311.7,2989 cw(c9311.7,2948.16) R4.1@9340.57,2977.04 ; 9316.22,2989 ccw(c9316.22,3023.44) R4.1@9340.57,2999.09 ; R4.1@9350,2989 9195,2989 ; 9195,2989 cw(c9195,3016.85) 9173.63,2999 ccw(c9195,3016.85) 9195,2989 ; 9195,2989 ccw(c9195,2961.15) 9173.63,2979.01 cw(c9195,2961.15) 9195,2989
NetP4_1: P4.1 R24.1 | length 449.9
  Top Layer w20: P4.1@1561,4351 1884.4,4351 R24.1@1890,4345.4 ; P4.1@1574.81,4337.19 cw(c1608.14,4303.86) 1608.14,4351 cw(c1608.14,4398.14) P4.1@1574.81,4364.81 ; 1834.91,4351 cw(c1834.91,4294.25) R24.1@1875.04,4334.38
NetQ1_1: Q1.1 R38.1 | length 273.6
  Top Layer w20: R38.1@9150.4,3853 9217,3853 9277.6,3792.4 Q1.1@9339.76,3792.4 ; R38.1@9161.43,3841.98 cw(c9188.04,3815.36) 9188.04,3853 cw(c9188.04,3890.64) R38.1@9161.43,3864.02
NetR20_1: R20.1 R21.3 | length 569.8
  Top Layer w20: R20.1@2233,4351.4 2667.4,4351.4 R21.3@2669,4353 ; R20.1@2247.96,4340.38 cw(c2274.58,4313.76) 2274.58,4351.4 cw(c2274.58,4389.04) R20.1@2247.96,4362.43 ; 2618,4351.4 ccw(c2618,4404) R21.3@2655.19,4366.81 ; 2625.72,4351.4 cw(c2625.72,4309.72) R21.3@2655.19,4339.19
NetR22_1: R22.1 R23.3 | length 458.2
  Top Layer w20: R22.1@3078,4353 R23.3@3403,4353 ; R22.1@3093.96,4341.38 cw(c3122.02,4313.32) 3122.02,4353 ; R22.1@3093.96,4363.43 ccw(c3119.13,4388.6) 3119.13,4353 ; R23.3@3392.19,4339.19 ccw(c3358.86,4305.86) 3358.86,4353 ccw(c3358.86,4400.14) R23.3@3392.19,4366.81
P1: P3.7 R5.2 U1.1 | length 1204.2
  Top Layer w20: v1@1947.4,2390 1947.97,2427.99 1947.98,2428.58 1948,2430 U1.1@2198,2430 ; R5.2@1947.4,2428 R5.2@1949.4,2430 ; R5.2@1950.46,2411.54 cw(c1995.04,2366.96) 1995.04,2430 ; R5.2@1958.43,2420.91 cw(c1980.36,2398.97) 1980.36,2430 ; R5.2@1958.43,2442.96 ccw(c1989.72,2474.25) 1989.72,2430 ; v1@1964.61,2397.39 cw(c2043.33,2318.67) 2043.33,2430
  Bottom Layer w20: P3.7@1573,2003 1659,2003 1780,2124 1780,2221 v1@1945.5,2386.5 ; P3.7@1586.81,1989.19 cw(c1620.14,1955.86) 1620.14,2003 cw(c1620.14,2050.14) P3.7@1586.81,2016.81 ; 1919.2,2360.2 ccw(c1871.4,2408) v1@1939,2408
  other v1: 1954,2408
P2: P3.4 R8.2 U4.1 | length 847.2
  Top Layer w20: R8.2@1945,1716 U4.1@2190,1716 ; R8.2@1949.99,1715.82 R8.2@1950,1716 ; R8.2@1956.61,1696.39 cw(c2003.94,1649.06) 2003.94,1716 ; R8.2@1958.43,1704.98 cw(c1985.04,1678.36) 1985.04,1716 cw(c1985.04,1753.64) R8.2@1958.43,1727.02
  Bottom Layer w20: P3.4@1573,1703 1742,1703 1743,1702 v1@1947,1702 ; P3.4@1586.81,1689.19 cw(c1620.14,1655.86) 1620.14,1703 cw(c1620.14,1750.14) P3.4@1586.81,1716.81 ; 1897.72,1702 ccw(c1897.72,1755.28) v1@1935.39,1717.61
  other v1: 1946,1707
PDPINTA: CN3.15 P6.10 | length 4544.3
  Top Layer w20: v2@8166,5523 9378,5523 9502,5399 P6.10@9502,5333 ; v2@8168.54,5528.54 ccw(c8181.9,5541.9) 8181.9,5523 ; P6.10@9489.19,5326.81 ccw(c9458.27,5357.73) 9502,5357.73 ; 9502,5362.56 ccw(c9552.56,5362.56) P6.10@9516.81,5326.81
  Bottom Layer w20: CN3.15@7980.19,3112.19 ccw(c7946.86,3078.86) 7946.86,3126 ccw(c7946.86,3173.14) CN3.15@7980.19,3139.81 ; CN3.15@7994,3126 7777,3126 7625,3278 7625,4464 7819,4658 7819,5184 v2@8166,5531 ; 8147.93,5512.93 cw(c8165,5495.86) v2@8165,5520
  other v2: 8165,5525
PDPINTB: CN3.19 P5.10 | length 9234.2
  Bottom Layer w20: P5.10@2671.19,5408.81 ccw(c2645.1,5434.9) 2682,5434.9 ; P5.10@2682,5394 2682,5725 3041,6084 7471,6084 7704,5851 7704,4980 7442,4718 7442,3093 7607,2928 CN3.19@7995,2928 ; 2682,5449.39 ccw(c2739.39,5449.39) P5.10@2698.81,5408.81 ; 7942.03,2928 cw(c7942.03,2874.03) CN3.19@7980.19,2912.19 ; 7951.68,2928 ccw(c7951.68,2968.32) CN3.19@7980.19,2939.81
PWM1: CN1.3 P6.17 RP1.1 | length 3477
  Top Layer w20: CN1.3@7479.19,5140.81 ccw(c7445.86,5174.14) 7493,5174.14 ccw(c7540.14,5174.14) CN1.3@7506.81,5140.81 ; CN1.3@7493,5130 7493,5188 7531,5226 7668,5226 8041,4853 9768,4853 9903,4988 P6.17@9903,5217 ; 8533.69,4853 cw(c8533.69,4830.69) v2@8549.46,4846.46 ; v2@8556.54,4846.46 cw(c8572.31,4830.69) 8572.31,4853 ; P6.17@9889.19,5199.19 cw(c9855.86,5165.86) 9903,5165.86 cw(c9950.14,5165.86) P6.17@9916.81,5199.19
  Bottom Layer w15: v2@8547.7,4855.3 ccw(c8534.89,4868.11) 8553,4868.11 ccw(c8571.11,4868.11) v2@8558.3,4855.3 ; RP1.1@8547.69,5151.53 cw(c8534.87,5138.71) 8553,5138.71 ; v2@8553,4849 RP1.1@8553,5177
  other v2: 8553,4850
PWM2: CN1.5 P6.18 RP1.2 | length 5433.5
  Top Layer w20: CN1.5@7379.19,5140.81 ccw(c7345.86,5174.14) 7393,5174.14 ccw(c7440.14,5174.14) CN1.5@7406.81,5140.81 ; CN1.5@7393,5127 7393,5230 7452,5289 7751,5289 8138,4902 v5@8450,4902 ; v1@7566.5,5822 9654,5822 9900,5576 P6.18@9900,5340 ; v1@7582.61,5814.39 cw(c7600.97,5796.03) 7600.97,5822 ; v1@7582.61,5835.61 ccw(c7615.46,5868.46) 7615.46,5822 ; P6.18@9889.19,5326.81 ccw(c9863.1,5352.9) 9900,5352.9 ; 9900,5367.39 ccw(c9957.39,5367.39) P6.18@9916.81,5326.81
  Bottom Layer w15: v5(8455,4900) 8515.35,4960.35 RP1.2@8515.35,5164 ; v5@8455,4905.5 ccw(c8455,4918.78) 8464.39,4909.39 ccw(c8473.78,4900) v5@8460.5,4900
  Bottom Layer w20: CN1.5@7379.19,5140.81 ccw(c7353.1,5166.9) 7390,5166.9 ; CN1.5@7390,5130 7390,5640 v1@7575,5825 ; 7390,5181.39 ccw(c7447.39,5181.39) CN1.5@7406.81,5140.81 ; 7544.27,5794.27 ccw(c7513.54,5825) v1@7557,5825 ; 7551.51,5801.51 cw(c7572,5781.03) v1@7572,5810
  other v1: 7572,5825
PWM3: CN1.7 P6.15 RP1.3 | length 3461.8
  Top Layer w20: CN1.7@7279.19,5140.81 ccw(c7231.37,5188.63) 7299,5188.63 ; CN1.7@7291,5127 7299,5135 7299,5264 7395,5360 7821,5360 8221,4960 8623,4960 8625,4958 9716,4958 9801,5043 P6.15@9801,5220 ; 7299,5159.66 ccw(c7325.66,5159.66) CN1.7@7306.81,5140.81 ; P6.15@9789.19,5199.19 cw(c9760.68,5170.68) 9801,5170.68 ; 9801,5161.03 cw(c9854.97,5161.03) P6.15@9816.81,5199.19
  Bottom Layer w15: v5(8415,4960) 8480.35,5025.35 RP1.3@8480.35,5165 ; v5@8415,4965.5 ccw(c8415,4978.78) 8424.39,4969.39 ccw(c8433.78,4960) v5@8420.5,4960
PWM4: CN1.9 P6.16 RP2.1 | length 4482.8
  Top Layer w20: v1@7355,5744 9576,5744 9802,5518 9802,5344 ; v1@7357.5,5742.5 v1(7357.5,5743.5) ; v1@7368.11,5732.89 cw(c7394.92,5706.08) 7394.92,5744 ; v1@7368.11,5754.11 ccw(c7392.51,5778.51) 7392.51,5744 ; 8827.37,5744 ccw(c8827.37,5783.63) v1@8855.39,5755.61 ; 8832.2,5744 cw(c8832.2,5711.2) v1@8855.39,5734.39 ; v1@8876.61,5734.39 cw(c8899.8,5711.2) 8899.8,5744 ; v1@8876.61,5755.61 ccw(c8904.63,5783.63) 8904.63,5744 ; P6.16@9789.19,5326.81 ccw(c9758.27,5357.73) 9802,5357.73 ; 9802,5362.56 ccw(c9852.56,5362.56) P6.16@9816.81,5326.81
  Bottom Layer w15: RP2.1@8797,5161.34 cw(c8813.07,5145.27) 8813.07,5168 ; RP2.1@8802,5168 8828,5168 8866,5206 v1(8866,5745) v1@8871,5745 ; v1@8853.63,5732.63 cw(c8823.75,5702.75) 8866,5702.75 cw(c8908.25,5702.75) v1@8878.37,5732.63
  Bottom Layer w20: CN1.9@7179.19,5140.81 ccw(c7145.86,5174.14) 7193,5174.14 ccw(c7240.14,5174.14) CN1.9@7206.81,5140.81 ; CN1.9@7193,5127 7193,5578 v1@7357.5,5742.5 ; 7331.19,5716.19 ccw(c7303.87,5743.5) v1@7342.5,5743.5 ; 7333.6,5718.6 cw(c7357.5,5694.7) v1@7357.5,5728.5
PWM5: CN1.11 P6.13 RP2.2 | length 3465.3
  Top Layer w20: CN1.11@7079.19,5140.81 ccw(c7050.68,5169.32) 7091,5169.32 ; CN1.11@7091,5126 7091,5308 7213,5430 7894,5430 8299,5025 8764,5025 8765,5024 9624,5024 9702,5102 P6.13@9702,5214 ; 7091,5178.97 ccw(c7144.97,5178.97) CN1.11@7106.81,5140.81 ; P6.13@9689.19,5199.19 cw(c9658.27,5168.27) 9702,5168.27 ; 9702,5163.44 cw(c9752.56,5163.44) P6.13@9716.81,5199.19
  Bottom Layer w15: v5@8761,5022 RP2.2@8761,5162 ; 8761,5047.94 ccw(c8787.93,5047.94) v5@8768.89,5028.89
  other v5: 8765,5025
PWM6: CN1.13 P6.14 RP2.3 | length 4885.6
  Top Layer w20: v1(7115,5663) 9504,5663 9700,5467 P6.14@9700,5341 ; v1@7125.61,5652.39 cw(c7151.21,5626.79) 7151.21,5663 cw(c7151.21,5699.21) v1@7125.61,5673.61 ; 8899.96,5663 ccw(c8899.96,5706.04) v1@8930.39,5675.61 ; 8909.62,5663 cw(c8909.62,5633.62) v1@8930.39,5654.39 ; v1@8951.61,5654.39 cw(c8972.38,5633.62) 8972.38,5663 ; v1@8951.61,5675.61 ccw(c8982.04,5706.04) 8982.04,5663 ; P6.14@9689.19,5326.81 ccw(c9663.1,5352.9) 9700,5352.9 ; 9700,5367.39 ccw(c9757.39,5367.39) P6.14@9716.81,5326.81
  Bottom Layer w15: RP2.3@8726,5158 8726,5002 8757,4971 ; 8756,4970 8903,4970 8940,5007 v1@8940,5665 ; v1@8928.63,5652.63 cw(c8901.17,5625.17) 8940,5625.17 ; 8940,5620.34 cw(c8985.66,5620.34) v1@8953.37,5652.63
  Bottom Layer w20: CN1.13@6979.19,5140.81 ccw(c6953.1,5166.9) 6990,5166.9 ; CN1.13@6990,5119 6990,5540 v1@7112.5,5662.5 ; 6990,5181.39 ccw(c7047.39,5181.39) CN1.13@7006.81,5140.81 ; 7085.98,5635.98 cw(c7115,5606.96) v1@7115,5648 ; 7090.81,5640.81 ccw(c7068.62,5663) v1@7100,5663
  other v1: 8941,5665
PWM7: CN1.19 P5.17 RP3.1 | length 4686.8
  Top Layer w20: P5.17@3071.19,5281.19 cw(c3037.86,5247.86) 3085,5247.86 cw(c3132.14,5247.86) P5.17@3098.81,5281.19 ; P5.17@3085,5297 3085,5243 3140,5188 4179,5188 4518,5527 6458,5527 6695,5290 CN1.19@6695,5125 ; 3605.54,5188 ccw(c3605.54,5234.46) v1@3638.39,5201.61 ; 3620.03,5188 cw(c3620.03,5162.03) v1@3638.39,5180.39 ; v1@3659.61,5180.39 cw(c3677.97,5162.03) 3677.97,5188 ; v1@3659.61,5201.61 ccw(c3692.46,5234.46) 3692.46,5188 ; CN1.19@6679.19,5140.81 ccw(c6641.03,5178.97) 6695,5178.97 ; 6695,5169.32 ccw(c6735.32,5169.32) CN1.19@6706.81,5140.81
  Bottom Layer w15: v1@3636.61,5203.36 ccw(c3605.81,5234.07) 3649.3,5234.13 ; RP3.1@3643.69,5444.53 cw(c3630.89,5431.69) 3649.02,5431.72 ; RP3.1@3649,5446 v1@3649.36,5192 ; 3649.31,5232.37 ccw(c3690.31,5232.43) v1@3661.36,5203.39
  other v1: 3649,5191
PWM8: CN1.21 P5.18 RP3.2 | length 4509.5
  Top Layer w20: P5.18@3071.19,5408.81 ccw(c3035.44,5444.56) 3086,5444.56 ; P5.18@3086,5394 3086,5508 3190,5612 v1@6297,5612 ; 3086,5439.73 ccw(c3129.73,5439.73) P5.18@3098.81,5408.81 ; 3610,5602 3610.01,5601 v8@3612.42,5402.01 ; 6261.54,5612 ccw(c6261.54,5658.46) v1@6294.39,5625.61 ; 6276.03,5612 cw(c6276.03,5586.03) v1@6294.39,5604.39 ; v1@6304,5615 v1(6305,5615)
  Bottom Layer w12: v8@3608.46,5403.54 ccw(c3599.93,5412.07) 3612,5412.07 ccw(c3624.07,5412.07) v8@3615.54,5403.54 ; RP3.2@3608.63,5443.47 cw(c3600.49,5435.33) 3612,5435.33 ; RP3.2@3611,5455 3612,5454 v8(3612,5400)
  Bottom Layer w20: v1@6305,5600 cw(c6305,5546.89) 6342.56,5584.44 ; v1(6305,5615) v1@6306,5614 ; v1@6309.5,5617.5 6593,5334 CN1.21@6593,5126 ; CN1.21@6579.19,5140.81 ccw(c6545.86,5174.14) 6593,5174.14 ccw(c6640.14,5174.14) CN1.21@6606.81,5140.81
PWM9: CN1.23 P5.15 RP3.3 | length 4652.5
  Top Layer w20: P5.15@2971.19,5281.19 cw(c2935.44,5245.44) 2986,5245.44 ; 2986,5250.27 cw(c3029.73,5250.27) P5.15@2998.81,5281.19 ; P5.15@2986,5297 2986,5218 3098,5106 4334,5106 4674,5446 6275,5446 6494,5227 CN1.23@6494,5121 ; 3536.37,5106 cw(c3536.37,5066.37) v1@3564.39,5094.39 ; 3541.2,5106 ccw(c3541.2,5138.8) v1@3564.39,5115.61 ; v1@3585.61,5094.39 cw(c3613.63,5066.37) 3613.63,5106 ; v1@3585.61,5115.61 ccw(c3608.8,5138.8) 3608.8,5106 ; CN1.23@6479.19,5140.81 ccw(c6443.44,5176.56) 6494,5176.56 ; 6494,5171.73 ccw(c6537.73,5171.73) CN1.23@6506.81,5140.81
  Bottom Layer w15: v1@3562.66,5117.41 ccw(c3532.04,5148.21) 3575.47,5148.08 ; v1(3575,5105) 3575.35,5105 RP3.3@3576.35,5458 ; 3575.46,5146.41 ccw(c3616.53,5146.3) v1@3587.41,5117.34
PWM10: CN1.25 P5.16 RP4.1 | length 5030.9
  Top Layer w20: P5.16@2971.19,5408.81 ccw(c2937.86,5442.14) 2985,5442.14 ccw(c3032.14,5442.14) P5.16@2998.81,5408.81 ; P5.16@2985,5415 2985,5587 3099,5701 v1@6081,5701 ; 4108.37,5701 cw(c4108.37,5661.37) v1@4136.39,5689.39 ; 4113.2,5701 ccw(c4113.2,5733.8) v1@4136.39,5710.61 ; v1@4157.61,5689.39 cw(c4185.63,5661.37) 4185.63,5701 ; v1@4157.61,5710.61 ccw(c4180.8,5733.8) 4180.8,5701 ; 6038.37,5701 ccw(c6038.37,5740.63) v1@6066.39,5712.61 ; 6043.2,5701 cw(c6043.2,5668.2) v1@6066.39,5691.39
  Bottom Layer w20: RP4.1@3958,5450.65 3958,5419 3987,5390 4116,5390 4148,5422 v1@4148,5699 ; v1@4136.39,5689.39 cw(c4108.37,5661.37) 4148,5661.37 ; v1(4147,5700) v1@4148,5701 ; 4148,5666.2 cw(c4180.8,5666.2) v1@4157.61,5689.39 ; v1@6074.5,5701.5 6097.5,5701.5 6393,5406 CN1.25@6393,5127 ; v1@6077,5687 cw(c6077,5602.5) 6136.75,5662.25 ; v1@6077,5707 cw(c6077,5670.79) 6102.61,5696.39 ; CN1.25@6379.19,5140.81 ccw(c6345.86,5174.14) 6393,5174.14 ccw(c6440.14,5174.14) CN1.25@6406.81,5140.81
  other v1: 6077,5702
PWM11: CN1.27 P5.13 RP4.2 | length 4625.2
  Top Layer w20: P5.13@2871.19,5281.19 cw(c2837.86,5247.86) 2885,5247.86 cw(c2932.14,5247.86) P5.13@2898.81,5281.19 ; P5.13@2885,5290 2885,5179 3034,5030 4473,5030 4806,5363 6143,5363 6295,5211 CN1.27@6295,5122 ; 3884.37,5030 ccw(c3884.37,5069.63) v1@3912.39,5041.61 ; 3889.2,5030 cw(c3889.2,4997.2) v1@3912.39,5020.39 ; v1@3933.61,5020.39 cw(c3956.8,4997.2) 3956.8,5030 ; v1@3933.61,5041.61 ccw(c3961.63,5069.63) 3961.63,5030 ; CN1.27@6279.19,5140.81 ccw(c6241.03,5178.97) 6295,5178.97 ; 6295,5169.32 ccw(c6335.32,5169.32) CN1.27@6306.81,5140.81
  Bottom Layer w15: v1@3910.63,5043.37 ccw(c3879.91,5074.09) 3923.35,5074.09 ; v1(3923,5031) 3923.35,5031 RP4.2@3923.35,5455 ; 3923.35,5072.41 ccw(c3964.41,5072.41) v1@3935.37,5043.37
PWM12: CN1.29 P5.14 RP4.3 | length 5492.6
  Top Layer w20: P5.14@2871.19,5408.81 ccw(c2837.86,5442.14) 2885,5442.14 ccw(c2932.14,5442.14) P5.14@2898.81,5408.81 ; P5.14@2885,5395 2885,5660 3012,5787 5840.5,5787 v1(5849,5786) ; v5@3886.5,5382.5 3955,5314 v2(4199,5314) ; v1@4284.39,5776.39 ccw(c4258.79,5750.79) 4258.79,5787 ccw(c4258.79,5823.21) v1@4284.39,5797.61 ; v1@4305.61,5776.39 cw(c4331.21,5750.79) 4331.21,5787 cw(c4331.21,5823.21) v1@4305.61,5797.61 ; 5810.37,5787 cw(c5810.37,5747.37) v1@5838.39,5775.39 ; 5815.2,5787 ccw(c5815.2,5819.8) v1@5838.39,5796.61
  Bottom Layer w12: v5@3882.05,5387.95 ccw(c3870.1,5399.9) 3887,5399.9 ccw(c3903.9,5399.9) v5@3891.95,5387.95 ; v5(3887,5383) RP4.3@3887,5450 ; 3887,5430.66 cw(c3900.87,5430.66) RP4.3@3891.06,5440.47
  Bottom Layer w20: v2(4199,5314) 4295,5410 v1(4295,5787) ; v1@4284.39,5776.39 cw(c4258.79,5750.79) 4295,5750.79 cw(c4331.21,5750.79) v1@4305.61,5776.39 ; v1@5849,5771 cw(c5849,5713.06) 5889.97,5754.03 ; v1(5849,5786) 5844.28,5799.72 6193,5451 CN1.29@6193,5127 ; CN1.29@6179.19,5140.81 ccw(c6145.86,5174.14) 6193,5174.14 ccw(c6240.14,5174.14) CN1.29@6206.81,5140.81
Q1: P3.6 R6.2 U2.1 | length 983.3
  Top Layer w20: R6.2@1946,2202 U2.1@2190,2202 ; R6.2@1958.43,2190.98 cw(c1985.04,2164.36) 1985.04,2202 cw(c1985.04,2239.64) R6.2@1958.43,2213.02 ; R6.2@1968.61,2179.39 cw(c2023.18,2124.82) 2023.18,2202
  Bottom Layer w20: P3.6@1573,1903 1678,1903 v1@1960,2185 ; P3.6@1586.81,1889.19 cw(c1620.14,1855.86) 1620.14,1903 cw(c1620.14,1950.14) P3.6@1586.81,1916.81 ; 1927.44,2152.44 ccw(c1889.89,2190) v1@1943,2190
  other v1: 1958,2190
Q2: P3.3 R9.2 U5.1 | length 1030.6
  Top Layer w20: R9.2@1938.55,1486.24 cw(c1916.64,1463.68) R9.2@1948.09,1464.14 ; R9.2@1945,1473 U5.1@2190,1473 ; R9.2@1945.46,1493.46 ccw(c1994.87,1542.87) 1994.87,1473 ; R9.2@1947.96,1473 R9.2@1948,1470 ; R9.2@1958.43,1461.98 cw(c1985.04,1435.36) 1985.04,1473 cw(c1985.04,1510.64) R9.2@1958.43,1484.02 ; v1@1959.61,1507.61 ccw(c2043.15,1591.15) 2043.15,1473 ; U5.1@2150.83,1473 cw(c2150.83,1458.39) U5.1@2161.16,1468.72
  Bottom Layer w20: P3.3@1573,1603 1643,1603 1746,1500 v1@1939,1500 ; P3.3@1586.81,1589.19 cw(c1620.14,1555.86) 1620.14,1603 cw(c1620.14,1650.14) P3.3@1586.81,1616.81 ; 1905.54,1500 cw(c1905.54,1453.54) v1@1938.39,1486.39 ; 1920.03,1500 ccw(c1920.03,1525.97) v1@1938.39,1507.61
  other v1: 1949,1497
R1: P3.5 R7.2 U3.1 | length 1079.1
  Top Layer w20: R7.2@1931.32,1943.68 cw(c1951.41,1923.59) R7.2@1951.41,1952 ; R7.2@1945,1952 U3.1@2190,1952 ; R7.2@1945.46,1929.54 cw(c1999.7,1875.3) 1999.7,1952 ; v1@1947.4,1916 1949.4,1952 R7.2@1947.4,1954 ; R7.2@1958.43,1939.04 cw(c1989.72,1907.75) 1989.72,1952 ; R7.2@1958.43,1961.09 ccw(c1980.36,1983.03) 1980.36,1952 ; v1@1959.61,1915.39 cw(c2047.98,1827.02) 2047.98,1952
  Bottom Layer w20: P3.5@1573,1803 1826,1803 1938,1915 v1@1938,1928 ; P3.5@1586.81,1789.19 cw(c1620.14,1755.86) 1620.14,1803 cw(c1620.14,1850.14) P3.5@1586.81,1816.81 ; v1@1934,1926 cw(c1897.79,1926) 1923.39,1900.39 cw(c1949,1874.79) v1@1949,1911
  other v1: 1949,1926
R2: P3.2 R10.2 U6.1 | length 1161.5
  Top Layer w20: P3.2@1573,1503 P3.2@1574,1502 ; R10.2@1951,1238 U6.1@2189,1238 ; R10.2@1960.43,1226.98 cw(c1987.04,1200.36) 1987.04,1238 cw(c1987.04,1275.64) R10.2@1960.43,1249.02
  Bottom Layer w20: 1523.44,1502 ccw(c1523.44,1552.56) P3.2@1559.19,1516.81 ; 1528.27,1502 cw(c1528.27,1458.27) P3.2@1559.19,1489.19 ; P3.2@1574,1502 1513,1502 1465,1454 1465,1315 1540,1240 v2@1955,1240
  other v2: 1958,1239
RELAY1: CN3.6 P6.9 | length 3069.2
  Bottom Layer w20: CN3.6@8092,3628 8397,3628 8750,3981 9543,3981 9637,4075 9637,4768 9502,4903 P6.9@9502,5210 ; CN3.6@8107.81,3612.19 cw(c8145.97,3574.03) 8145.97,3628 ; CN3.6@8107.81,3639.81 ccw(c8136.32,3668.32) 8136.32,3628 ; P6.9@9489.19,5199.19 cw(c9458.27,5168.27) 9502,5168.27 ; 9502,5163.44 cw(c9552.56,5163.44) P6.9@9516.81,5199.19
RST1: CN1.15 P6.11 | length 3425.9
  Top Layer w20: CN1.15@6879.19,5140.81 ccw(c6848.27,5171.73) 6892,5171.73 ; CN1.15@6892,5126 6892,5386 7016,5510 7966,5510 8367,5109 9575,5109 9603,5137 9603,5202 P6.11@9594,5211 ; 6892,5176.56 ccw(c6942.56,5176.56) CN1.15@6906.81,5140.81 ; P6.11@9589.19,5199.19 cw(c9555.86,5165.86) 9603,5165.86 cw(c9650.14,5165.86) P6.11@9616.81,5199.19
RST2: CN1.33 P5.12 | length 4395.2
  Top Layer w20: P5.12@2771.19,5408.81 ccw(c2737.86,5442.14) 2785,5442.14 ccw(c2832.14,5442.14) P5.12@2798.81,5408.81 ; P5.12@2785,5398 2785,5752 2902,5869 v1(5624,5866) ; v1@5613.38,5855.41 ccw(c5587.75,5829.83) 5587.79,5866.04 ccw(c5587.83,5902.25) v1@5613.41,5876.62
  Bottom Layer w20: v1@5624,5851 cw(c5624,5802.72) 5658.14,5836.86 ; v1@5627.5,5867.5 5993,5502 CN1.33@5993,5127 ; v1@5639,5866 ccw(c5663.14,5866) 5646.07,5848.93 ; CN1.33@5979.19,5140.81 ccw(c5945.86,5174.14) 5993,5174.14 ccw(c6040.14,5174.14) CN1.33@6006.81,5140.81
SPICLKA: CN3.12
SPISIMOA: 
SPISOMIA: 
SPISTEA: CN3.14
pads on no net: CN2.43 CN2.44 CN2.45 CN2.46 CN2.47 CN2.48 CN3.4 CN3.24 P5.3 RP1.4 RP2.4 RP3.4 RP4.4

## Keep-outs
Keep-Out Layer:
  lines w15: 1270,1007 ccw(c1519.77,1011.04) 1491.97,762.79 ; 1272,1004 1272,5956 ; 1273.64,5958.76 cw(c1487.78,5943.42) 1466,6157 ; 1469,6157 1685,6157 ; 1487,762 10393,762 ; 1668,6158 10425,6158 ; 10345,760 ccw(c10348.5,1017.5) 10606.02,1016.66 ; 10381,6158 cw(c10394.7,5950.44) 10602.63,5944.74 ; 10604,980 10604,5964

## Silkscreen, mask and mechanical layers (free items; w line width, h text height)
Top Overlay:
  lines w20: 8314,1012 8314,5342 4359,5342 4359,1017 8314,1017
  text "+5" at 1380,3656 h40
  text "L1" at 1394,3557 h40
  text "M1" at 1393,3458 h40
  text "N1" at 1400,3354 h40
  text "L2" at 1390,3244 h40
  text "M2" at 1393,3151 h40
  text "N2" at 1392,3056 h40
  text "GNDHALL" at 1292,2950 h40
  text "+5" at 1373,2102 h40
  text "P1" at 1377,2011 h40
  text "Q1" at 1380,1908 h40
  text "R1" at 1378,1800 h40
  text "P2" at 1372,1699 h40
  text "Q2" at 1367,1603 h40
  text "R2" at 1370,1497 h40
  text "GNDHALL" at 1300,1397 h40
  text "GND" at 9312,1022 h40
  text "+5_HALL" at 8728,1017 h40

## Text inside footprints (layer, text, board x,y; h text height)
CN1: Top Overlay "2" at 7693,5047 h50 r180; Top Overlay "1" at 7693,5147 h50 r180
CN2: Top Overlay "2" at 7693,1248 h50 r180; Top Overlay "1" at 7693,1348 h50 r180; Top Overlay "49" at 5113,1348 h50 r180; Top Overlay "50" at 5113,1248 h50 r180
CN3: Top Overlay "1" at 7974,3926 h50 r270; Top Overlay "2" at 8074,3926 h50 r270; Top Overlay "29" at 7974,2366 h50 r270; Top Overlay "30" at 8074,2366 h50 r270
P5: Top Overlay "20" at 3245,5375 h50; Top Overlay "19" at 3245,5275 h50; Top Overlay "1" at 2185,5275 h50; Top Overlay "2" at 2185,5375 h50
P6: Top Overlay "20" at 10063,5293 h50; Top Overlay "19" at 10063,5193 h50; Top Overlay "1" at 9003,5193 h50; Top Overlay "2" at 9003,5293 h50